# EAGLE board 555piano (EAGLE 7.3.0)
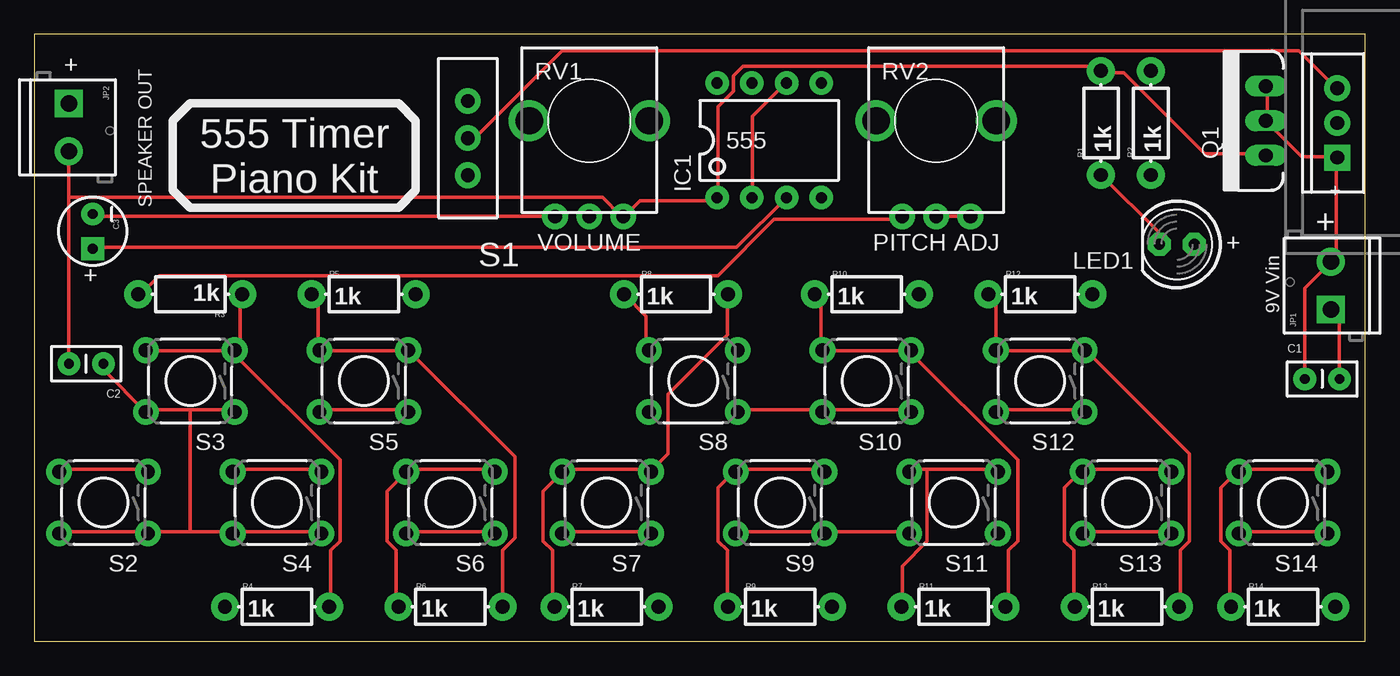
[diagram p0: board, top side]
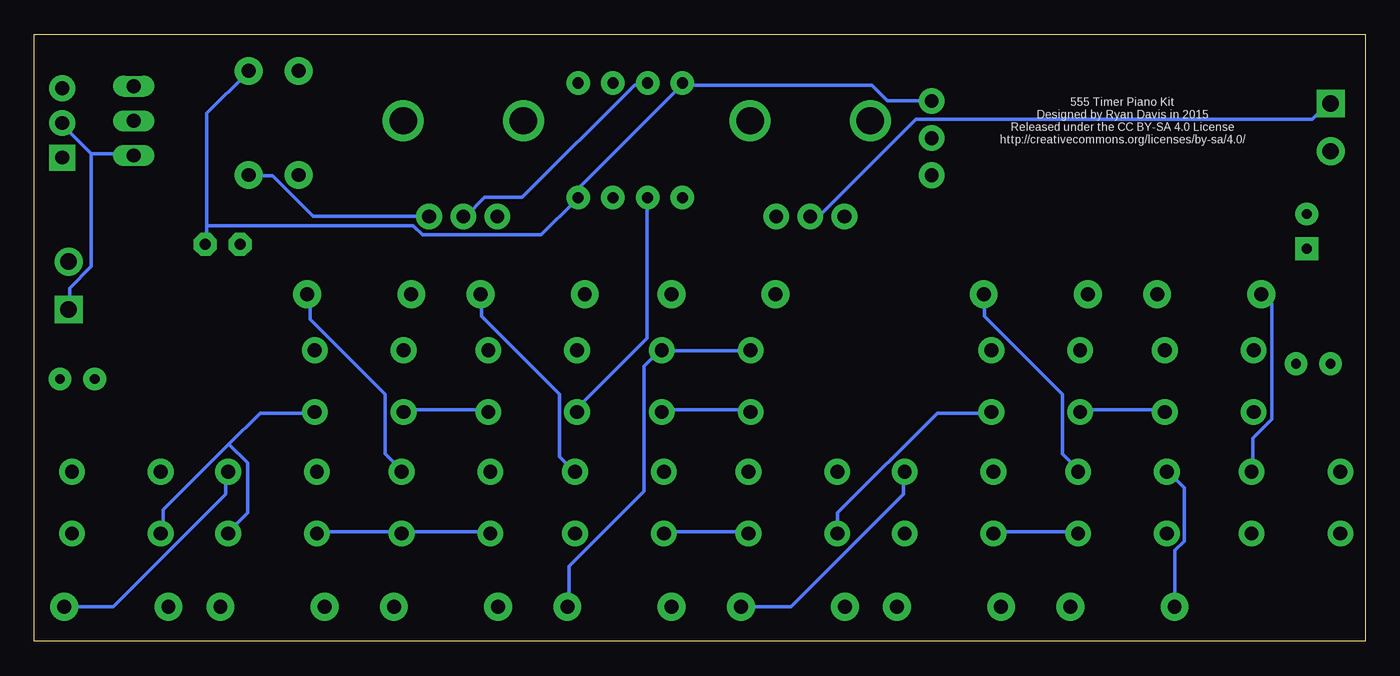
[diagram p1: board, bottom side, seen from below]

Size 97.46 x 44.44 mm. Coordinates in mm from the lower left corner, seen from the top.
Outline: 0,0 97.46,0 97.46,44.44 0,44.44 0,0
Copper layers (1*16): Top 0.035mm / dielectric 1.5mm / Bottom 0.035mm
Design rules "default": minimum track width 10mil, minimum drill 24mil, track to track 8mil, track to pad 8mil, pad to pad 8mil, via to via 8mil, smd to smd 8mil, copper to edge 40mil, drill to drill 8mil, minimum pad ring 10mil, minimum via ring 8mil, stop-mask expansion 4mil, vias tented up to drill 0mil, thermal gap 10mil

## Footprints (pad centres in the part's own frame; a part is rotated, then mirrored left to right if it is on the bottom)
CAP-PTH-SMALLEZ = drill 0.7 pad 1.651: 1 0,0; 2 2.54,0
CPOL-RADIAL-10UF-25V = drill 0.7 pad 1.651 square: 1 1.27,0 | drill 0.7 pad 1.651: 2 -1.27,0
DIP08-KIT = drill 0.813 pad 1.727: 1 -3.81,-4.191; 2 -1.27,-4.191; 3 1.27,-4.191; 4 3.81,-4.191; 5 3.81,4.191; 6 1.27,4.191; 7 -1.27,4.191; 8 -3.81,4.191
SCREWTERMINAL-3.5MM-2 = drill 1.2 pad 2.032 square: 1 0,0 | drill 1.2 pad 2.032: 2 3.5,0
LED5MM = drill 0.813 pad 1.676 octagon: A -1.27,0; K 1.27,0
TO220V = drill 1.016 long: 1 -2.54,0; 2 0,0; 3 2.54,0
AXIAL-0.3-KIT = drill 1.016 pad 2.032: P$1 -3.81,0; P$2 3.81,0
ALPS_POT_KIT = drill 1 pad 1.88: P$1 7,-2.5; P$2 7,0; P$3 7,2.5 | drill 2: P$4 0,-4.4; P$5 0,4.4
SWITCH-SPDT_KIT = drill 1.016 pad 1.88: 1 0,2.718; 2 0,0; 3 0,-2.718
TACTILE-PTH = drill 1.016 pad 1.88: 1 -3.251,2.261; 2 3.251,2.261; 3 -3.251,-2.261; 4 3.251,-2.261
TO220-IGO = drill 1 pad 1.88: GND 0,0; OUT 2.54,0 | drill 1 pad 1.88 square: IN -2.54,0

## Placement (x,y rotation side)
C1  10uf  [CAP-PTH-SMALLEZ]  93.03,19.21 0 top
C2  0.1uf  [CAP-PTH-SMALLEZ]  5.08,20.32 180 top
C3  10uf  [CPOL-RADIAL-10UF-25V]  4.29,30 270 top
FRAME1  FRAME-LETTERNO_PACKAGE  [DUMMY]  0,0 0 top
IC1  555  [DIP08-KIT]  53.82,36.67 0 top
JP1  [SCREWTERMINAL-3.5MM-2]  94.93,24.29 90 top
JP2  [SCREWTERMINAL-3.5MM-2]  2.54,39.37 270 top
LED1  [LED5MM]  83.66,29.05 180 top
Q1  [TO220V]  90.17,38.1 90 top
R1  1k  [AXIAL-0.3-KIT]  78.11,37.94 90 top
R2  1k  [AXIAL-0.3-KIT]  81.76,37.94 90 top
R3  1k  [AXIAL-0.3-KIT]  11.43,25.4 180 top
R4  1k  [AXIAL-0.3-KIT]  17.78,2.54 0 top
R5  1k  [AXIAL-0.3-KIT]  24.13,25.4 0 top
R6  1k  [AXIAL-0.3-KIT]  30.48,2.54 0 top
R7  1k  [AXIAL-0.3-KIT]  41.91,2.54 0 top
R8  1k  [AXIAL-0.3-KIT]  46.99,25.4 0 top
R9  1k  [AXIAL-0.3-KIT]  54.61,2.54 0 top
R10  1k  [AXIAL-0.3-KIT]  60.96,25.4 0 top
R11  1k  [AXIAL-0.3-KIT]  67.31,2.54 0 top
R12  1k  [AXIAL-0.3-KIT]  73.66,25.4 0 top
R13  1k  [AXIAL-0.3-KIT]  80.01,2.54 0 top
R14  1k  [AXIAL-0.3-KIT]  91.44,2.54 0 top
RV1  [ALPS_POT_KIT]  40.64,38.1 270 top
RV2  [ALPS_POT_KIT]  66.04,38.1 270 top
S1  [SWITCH-SPDT_KIT]  31.75,36.83 180 top
S2  [TACTILE-PTH]  5.08,10.16 180 top
S3  [TACTILE-PTH]  11.43,19.05 180 top
S4  [TACTILE-PTH]  17.78,10.16 180 top
S5  [TACTILE-PTH]  24.13,19.05 180 top
S6  [TACTILE-PTH]  30.48,10.16 180 top
S7  [TACTILE-PTH]  41.91,10.16 180 top
S8  [TACTILE-PTH]  48.26,19.05 180 top
S9  [TACTILE-PTH]  54.61,10.16 180 top
S10  [TACTILE-PTH]  60.96,19.05 180 top
S11  [TACTILE-PTH]  67.31,10.16 180 top
S12  [TACTILE-PTH]  73.66,19.05 180 top
S13  [TACTILE-PTH]  80.01,10.16 180 top
S14  [TACTILE-PTH]  91.44,10.16 180 top
U1  [TO220-IGO]  95.41,37.94 90 top

## Library data of the parts
C1-C3 = SparkFun-Capacitors
FRAME1 = SparkFun-Aesthetics; DESIGNER: Nobody; VERSION: v01
IC1 = SparkFun-AnalogIC; PROD_ID: IC-11930
JP1 JP2 = SparkFun-Connectors; PROD_ID: CONN-08399
LED1 = adafruit
Q1 = SparkFun-DiscreteSemi
R1 R2 = SparkFun-Passives
R3-R14 = SparkFun-Resistors
RV1 RV2 = SparkFun-Electromechanical; PROD_ID: RES-09177
S1 = SparkFun-Electromechanical; PROD_ID: SWCH-08261
S2-S14 = SparkFun-Retired
U1 = SparkFun-PowerIC

## Nets
DIS: IC1.7 R2.P$1 RV2.P$2 RV2.P$3
GND: C1.2 C2.2 IC1.1 JP1.1 JP2.2 Q1.1 R1.P$2 RV1.P$3 U1.GND
N$1: C1.1 JP1.2 Q1.2 Q1.3 U1.IN
N$3: S1.2 U1.OUT
N$4: LED1.K R1.P$1
N$6: C3.1 IC1.3
N$7: C3.2 RV1.P$1
N$8: JP2.1 RV1.P$2
N$9: R14.P$1 S14.3 S14.4
N$10: R13.P$1 R14.P$2 S13.3 S13.4
N$11: R12.P$1 R13.P$2 S12.3 S12.4
N$12: R11.P$1 R12.P$2 S11.3 S11.4
N$13: R10.P$1 R11.P$2 S10.3 S10.4
N$14: R9.P$1 R10.P$2 S9.3 S9.4
N$15: R8.P$1 R9.P$2 S8.3 S8.4
N$16: R7.P$1 R8.P$2 S7.3 S7.4
N$17: R6.P$1 R7.P$2 S6.3 S6.4
N$18: R5.P$1 R6.P$2 S5.3 S5.4
N$19: R4.P$1 R5.P$2 S4.3 S4.4
N$20: R3.P$1 R4.P$2 S3.3 S3.4
N$21: R3.P$2 RV2.P$1 S2.3 S2.4
TRI: C2.1 IC1.2 IC1.6 S2.1 S2.2 S3.1 S3.2 S4.1 S4.2 S5.1 S5.2 S6.1 S6.2 S7.1 S7.2 S8.1 S8.2 S9.1 S9.2 S10.1 S10.2 S11.1 S11.2 S12.1 S12.2 S13.1 S13.2 S14.1 S14.2
VCC: IC1.4 IC1.8 LED1.A R2.P$2 S1.3

## Tracks (layer width: path | path; a pad name or v marks a point on that pad's centre or on a via)
DIS
  Top 0.254: RV2.P$3 68.35,31.11 66.06,31.11 RV2.P$2
  Bottom 0.254: IC1.7 52.58,40.72 53.49,40.72 61.72,32.49 64.47,32.49 65.84,31.11 RV2.P$2 | R2.P$1 81.61,34.09 80.01,34.09 77.04,31.11 68.58,31.11 RV2.P$3
GND
  Top 0.254: 2.52,32.49 2.52,35.69 JP2.2 | 2.52,32.49 2.52,20.37 C2.2 | C1.2 95.56,19.23 95.56,23.8 95.1,24.26 JP1.1 | Q1.1 90.07,35.69 85.72,35.69 79.78,41.63 78.18,41.63 R1.P$2 77.95,41.86 77.72,42.09 51.89,42.09 51.21,41.4 51.21,40.26 50.06,39.12 50.06,32.49 IC1.1 49.84,32.26 44.35,32.26 43.2,31.11 RV1.P$3 42.98,31.11 41.6,32.49 2.52,32.49
  Bottom 0.254: 93.27,35.69 90.3,35.69 Q1.1 | 93.27,35.69 95.33,37.74 U1.GND | 93.27,35.69 93.27,27.46 94.87,25.86 94.87,24.49 JP1.1
N$1
  Top 0.254: Q1.3 90.3,40.49 90.3,38.2 Q1.2 92.81,35.46 95.33,35.46 U1.IN 95.33,35.23 95.33,28.14 95.1,27.91 JP1.2 94.87,27.69 93.04,25.86 93.04,19.23 C1.1
N$3
  Top 0.254: S1.2 32.23,36.83 38.63,43.23 92.58,43.23 95.33,40.49 U1.OUT
N$4
  Top 0.254: LED1.K 82.3,29.06 82.3,29.97 78.18,34.09 R1.P$1
N$6
  Top 0.254: IC1.3 51.44,28.83 4.34,28.83 C3.1
N$7
  Top 0.254: C3.2 4.34,31.11 37.95,31.11 RV1.P$1
N$8
  Bottom 0.254: RV1.P$2 40.46,31.11 40.01,31.11 32.92,38.2 3.89,38.2 2.74,39.34 JP2.1
N$9
  Top 0.254: S14.3 94.64,12.6 88.24,12.6 S14.4 88.01,12.37 86.87,11.23 86.87,7.34 87.55,6.66 87.55,2.54 R14.P$1
N$10
  Top 0.254: S13.3 83.21,12.6 76.81,12.6 S13.4 76.58,12.37 75.44,11.23 75.44,7.34 76.12,6.66 76.12,2.54 R13.P$1
  Bottom 0.254: R14.P$2 91.67,2.54 83.44,10.77 83.44,12.37 S13.3
N$11
  Top 0.254: R12.P$1 69.95,25.4 70.41,24.94 S12.4 70.41,21.29 76.81,21.29 S12.3 77.04,21.29 84.58,13.74 84.58,7.34 83.9,6.66 83.9,2.54 R13.P$2
N$12
  Top 0.254: 65.38,12.6 70.41,12.6 S11.3 | 65.38,12.6 64.24,12.6 S11.4 | 65.38,12.6 65.38,7.34 63.55,5.51 63.55,2.54 R11.P$1
  Bottom 0.254: R12.P$2 77.27,25.4 77.27,23.57 71.78,18.09 71.78,13.74 70.64,12.6 S11.3
N$13
  Top 0.254: R10.P$1 57.61,24.94 57.61,21.51 S10.4 57.84,21.29 64.01,21.29 | 64.01,21.29 72.01,13.28 72.01,7.34 71.32,6.66 71.32,2.54 R11.P$2 | 64.01,21.29 S10.3
N$14
  Top 0.254: S9.3 57.84,12.6 51.44,12.6 S9.4 51.21,12.37 50.06,11.23 50.06,7.34 50.75,6.66 50.75,2.54 R9.P$1
  Bottom 0.254: R10.P$2 64.69,25.4 64.69,23.8 58.98,18.09 58.98,13.51 58.06,12.6 S9.3
N$15
  Top 0.254: S8.4 44.81,21.51 44.81,23.8 43.2,25.4 R8.P$1
  Bottom 0.254: S8.4 45.03,21.29 51.44,21.29 S8.3 51.66,21.29 52.81,20.14 52.81,11 58.29,5.51 58.29,2.54 R9.P$2
N$16
  Top 0.254: R7.P$1 37.95,2.54 37.95,6.66 37.26,7.34 37.26,11 38.63,12.37 S7.4 38.86,12.6 45.03,12.6 S7.3 45.26,12.6 46.41,13.74 46.41,18.09 50.75,22.43 50.75,25.4 R8.P$2
N$17
  Top 0.254: S6.3 33.6,12.6 27.43,12.6 S6.4 27.2,12.37 25.83,11 25.83,7.34 26.52,6.66 26.52,2.54 R6.P$1
  Bottom 0.254: R7.P$2 42.06,2.54 33.83,10.77 33.83,12.37 S6.3
N$18
  Top 0.254: R5.P$1 20.34,25.4 20.8,24.94 20.8,21.51 S5.4 21.03,21.29 27.2,21.29 S5.3 27.43,21.29 35.2,13.51 35.2,7.57 34.29,6.66 R6.P$2
N$19
  Top 0.254: S4.4 14.63,12.6 21.03,12.6 S4.3
  Bottom 0.254: R4.P$1 13.95,2.54 13.95,6.66 13.26,7.34 13.26,11.23 14.4,12.37 S4.4 | R5.P$2 27.89,25.4 27.89,23.8 22.17,18.09 22.17,13.74 21.03,12.6 S4.3
N$20
  Top 0.254: 14.4,21.29 14.63,21.29 S3.3 | 14.4,21.29 8.23,21.29 S3.4 | R3.P$1 15.09,25.4 15.09,21.74 14.86,21.51 S3.3 | 14.4,21.29 22.4,13.28 22.4,7.34 21.72,6.66 21.72,2.54 R4.P$2 | 14.4,21.29 S3.3
N$21
  Top 0.254: S2.4 1.83,12.6 8.23,12.6 S2.3 | RV2.P$1 63.32,30.89 54.18,30.89 50.06,26.77 9.14,26.77 7.77,25.4 R3.P$2
  Bottom 0.254: S2.3 8.23,12.6 8.23,14.88 6.86,16.26 6.86,24.71 7.54,25.4 R3.P$2
TRI
  Top 0.254: IC1.2 52.58,32.49 52.58,38.43 54.86,40.72 IC1.6 | S8.1 51.66,16.94 57.61,16.94 S10.2 57.84,16.94 64.01,16.94 S10.1 | S14.2 88.24,8.03 94.64,8.03 S14.1 | S12.1 76.81,16.94 70.41,16.94 S12.2 | C2.1 5.26,20.14 5.26,19.68 8,16.94 S3.2 8.23,16.94 11.43,16.94 | S5.1 27.2,16.94 21.03,16.94 S5.2 | 11.43,16.94 14.63,16.94 S3.1 | S2.2 1.83,8.03 8.23,8.03 S2.1 8.46,8.03 11.43,8.03 | 11.43,8.03 14.4,8.03 S4.2 14.63,8.03 21.03,8.03 S4.1 | S6.1 33.6,8.03 27.43,8.03 S6.2 | 11.43,8.03 11.43,16.94 | S7.2 38.86,8.03 45.03,8.03 S7.1 | S11.2 64.01,8.03 58.06,8.03 S9.1 57.84,8.03 51.44,8.03 S9.2 | S13.1 83.21,8.03 76.81,8.03 S13.2
  Bottom 0.254: S8.2 45.03,16.94 51.44,16.94 S8.1 | IC1.2 52.58,32.26 52.58,22.2 57.84,16.94 S10.2 | S10.1 64.24,16.94 70.41,16.94 S12.2 | 83.21,14.43 80.92,16.71 77.04,16.71 S12.1 | 83.21,14.43 88.01,9.63 88.01,8.03 S14.2 | S3.1 14.86,16.94 20.8,16.94 S5.2 | S4.1 21.03,8.03 27.2,8.03 S6.2 | S9.2 51.21,8.03 45.26,8.03 S7.1 | S13.2 76.58,8.03 70.64,8.03 S11.1 70.41,8.03 64.24,8.03 S11.2 | S5.1 27.43,16.71 31.32,16.71 38.63,9.4 38.63,8.03 S7.2 | 83.21,14.43 81.84,13.06 81.84,9.4 83.21,8.03 S13.1
VCC
  Bottom 0.254: 84.81,30.43 84.81,38.66 81.84,41.63 R2.P$2 | 84.81,30.43 84.81,29.06 LED1.A | S1.3 31.77,39.57 34.98,39.57 36.12,40.72 49.84,40.72 IC1.8 50.06,40.72 57.61,33.17 57.61,32.49 IC1.4 57.84,32.26 60.35,29.74 69.04,29.74 69.72,30.43 84.81,30.43

## Text on the board
tPlace: + | SPEAKER OUT | 555 Timer / Piano Kit | + | VOLUME | PITCH ADJ | + | + | 9V Vin | +
bPlace: 555 Timer Piano Kit / Designed by Ryan Davis in 2015 / Released under the CC BY-SA 4.0 License / http://creativecommons.org/licenses/by-sa/4.0/